# Altium PCB Modulo_MotorDC.PcbDoc
Units mil, origin at the board's own origin, x right, y up, seen from the top; angles counter-clockwise.
Board outline 5000 x 4000 mil, 2 copper layers (Top Layer, Bottom Layer); 45 components, 43 nets, 174 pads, 7 vias.
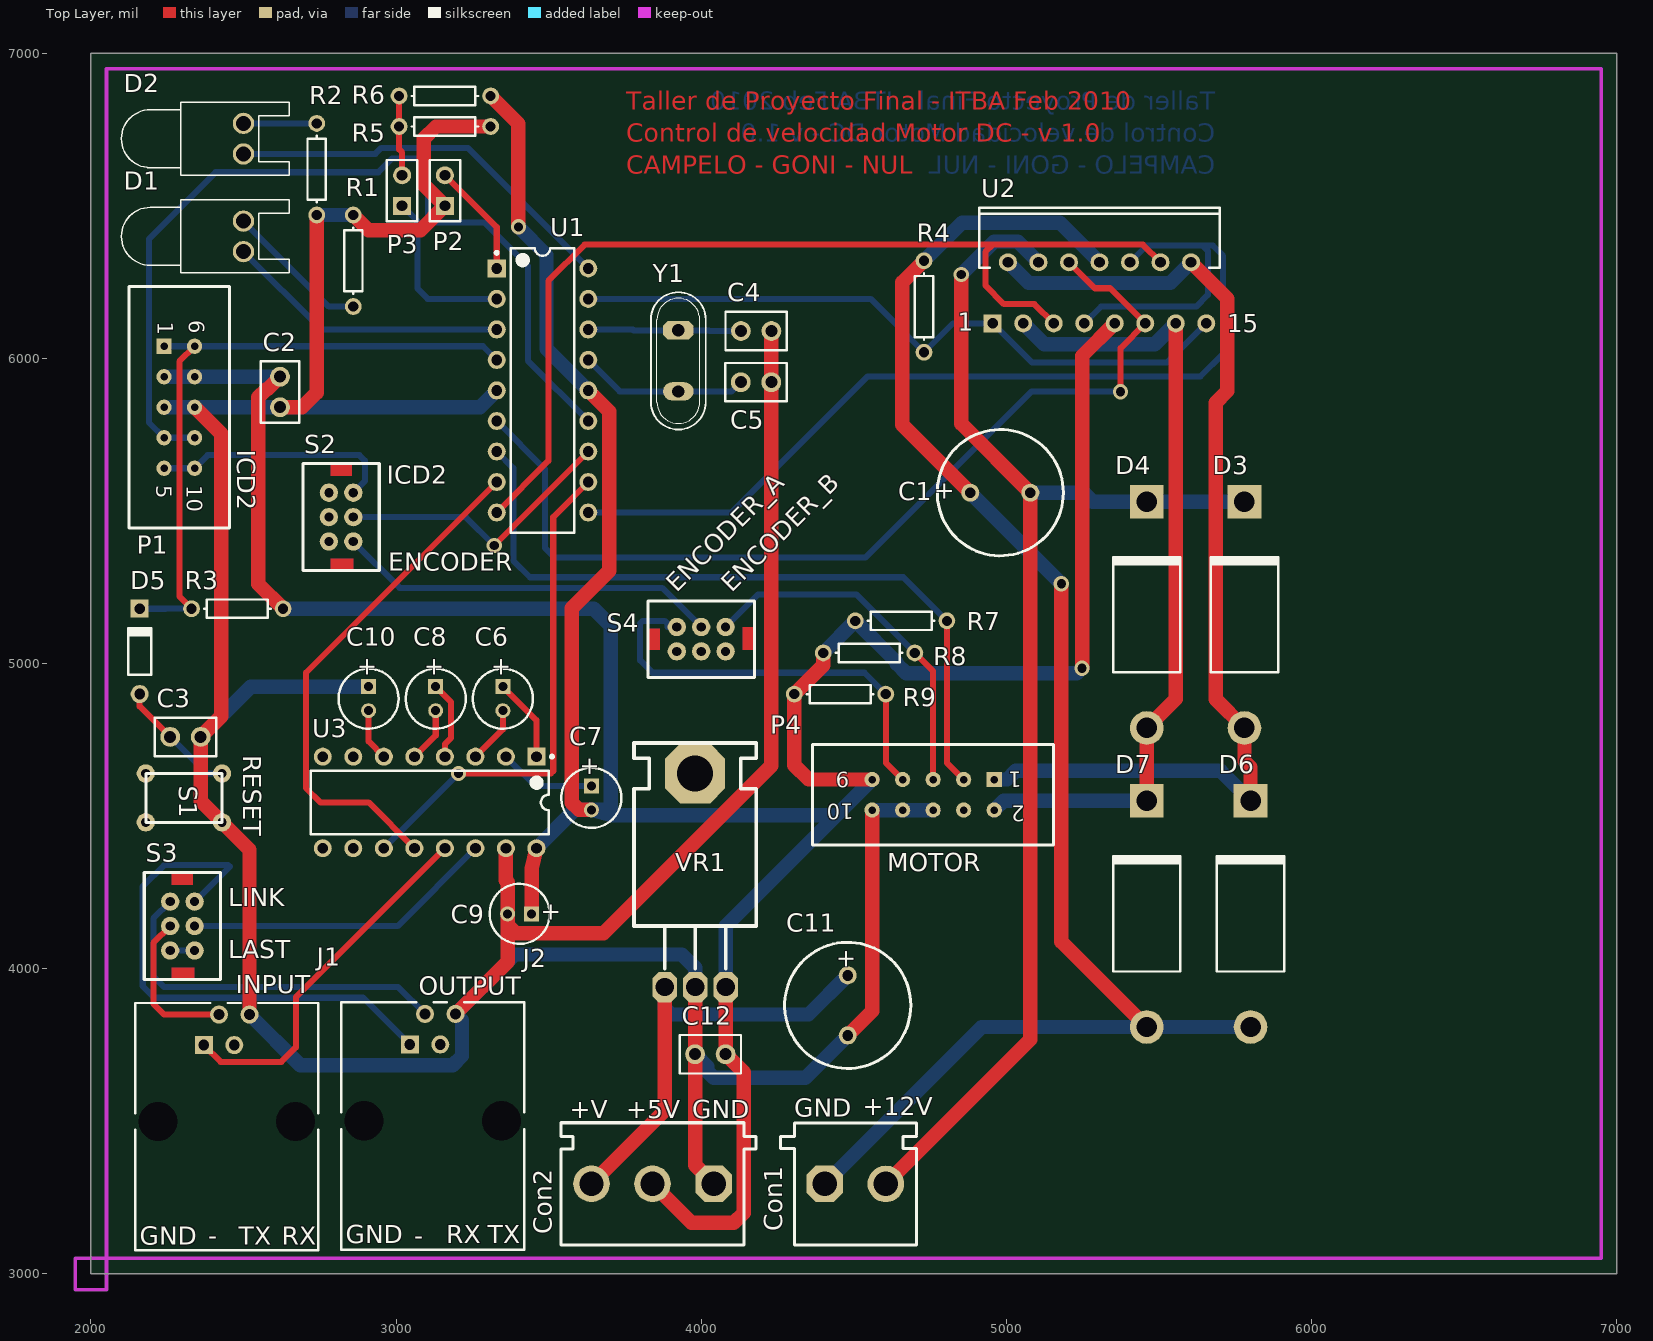
[diagram p0: Top Layer view]
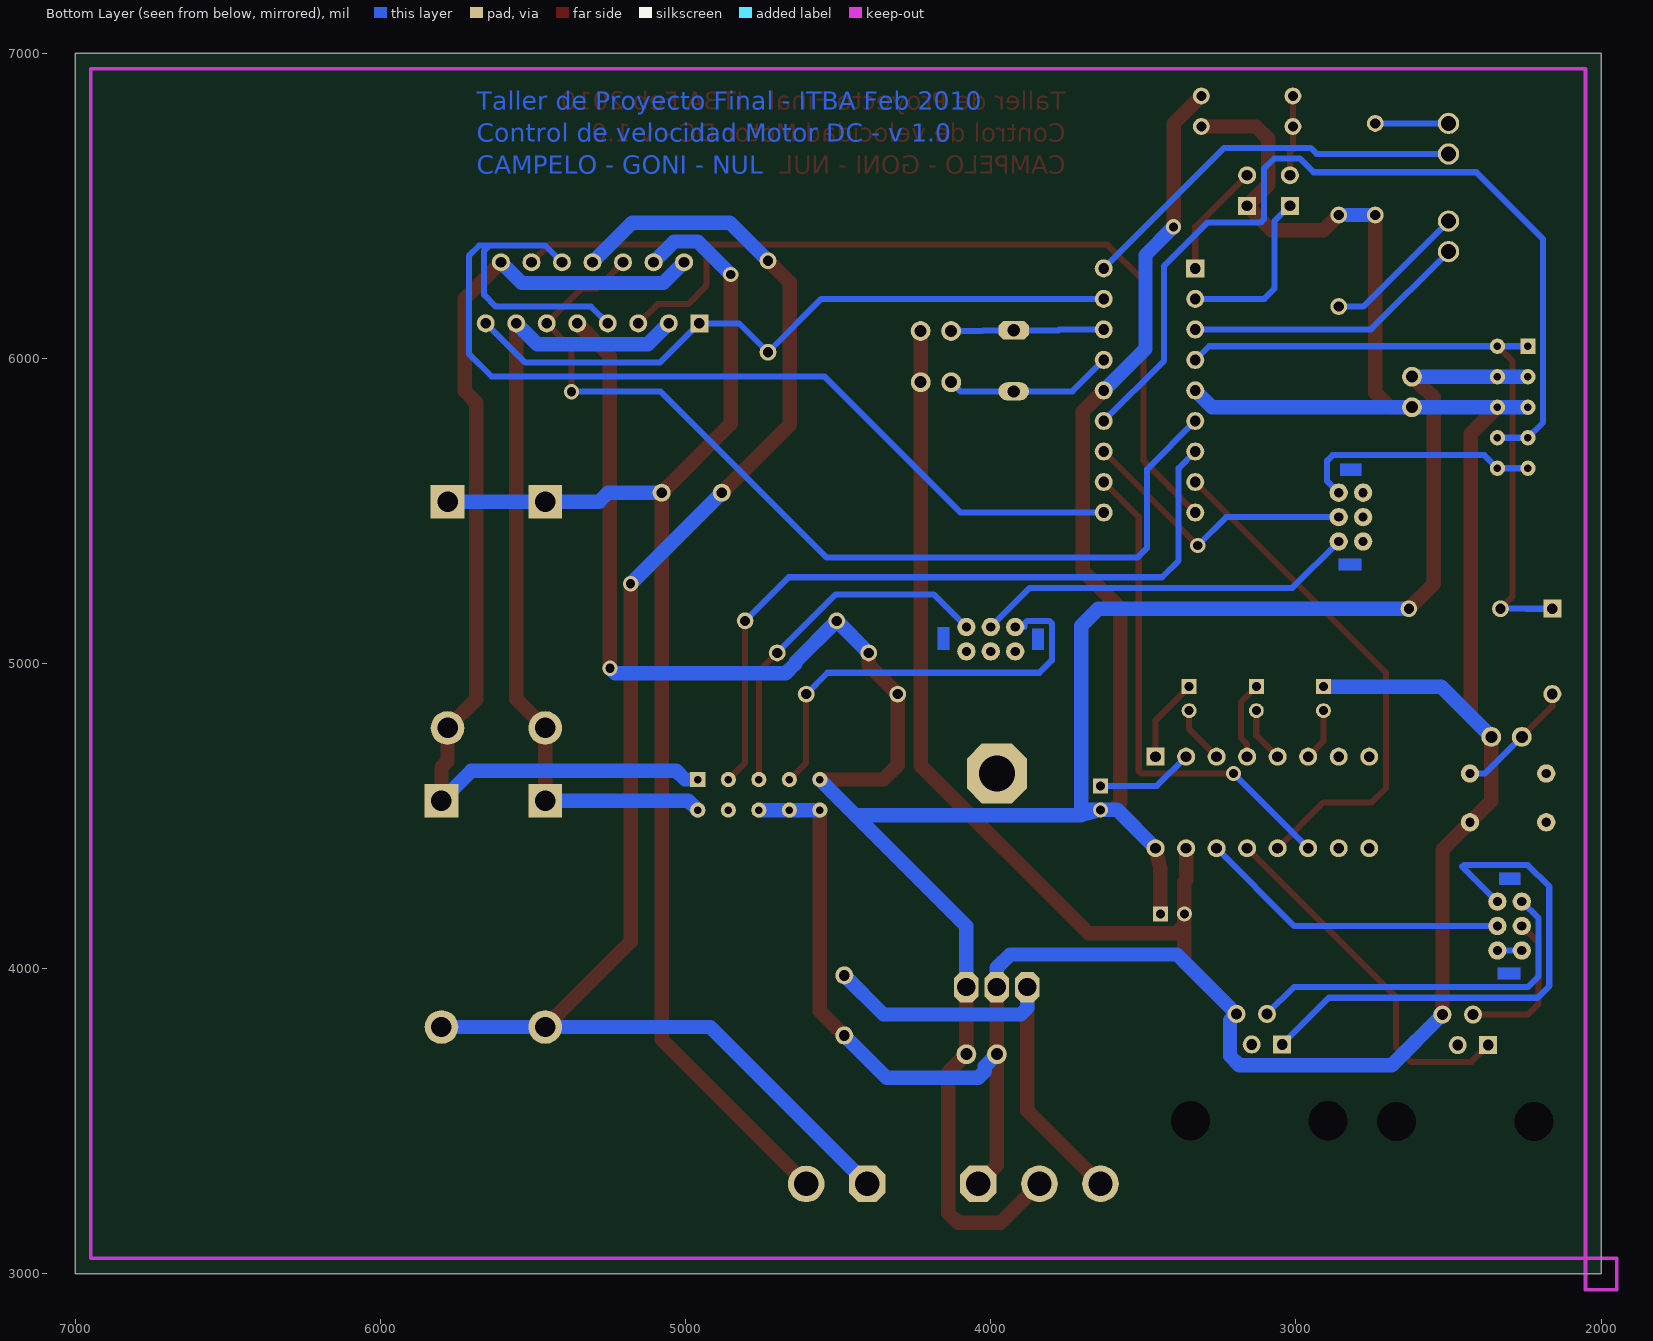
[diagram p1: Bottom Layer view, seen from below]

## Layer stack, top to bottom
Top Layer: signal copper 1.4
Dielectric: dielectric 12.6, FR-4, Dk 4.8
Bottom Layer: signal copper 1.4

## Board outline
2000,3000 7000,3000 7000,7000 2000,7000

## Design rules (kind name [scope] priority, off if disabled: settings)
Clearance [All] p1: gap=15
DiffPairsRouting [All] p1: maxlimit=10 minlimit=10 mostfreqgap=10 maxuncoupledlength=750
PolygonConnect [All] p1: connectstyle=Relief reliefconductorwidth=10 reliefentries=4 polygonreliefangle="90 Angle"
RoutingVias [All] p1: holewidth=30 width=50 viastyle="Through Hole" minholewidth=30 minwidth=50 maxholewidth=50 maxwidth=70
SilkscreenOverComponentPads [All] p1: minsilkscreentomaskgap=10
SolderMaskExpansion [All] p1: expansion=4
Width Signal [NOT (InNet('+12V MOTOR') OR InNet('MOTOR GND') OR InNet('MOTOR_A') OR InNet('MOTOR_B') OR InNet('+5V VCC') OR InNet('+V LOGIC') OR InNet('GND'))] p1: maxlimit=25 minlimit=15 preferedwidth=20 minimp=50.000000 maximp=50.000000 favimp=50.000000
Width Power [(InNet('+12V MOTOR') OR InNet('MOTOR GND') OR InNet('MOTOR_A') OR InNet('MOTOR_B') OR InNet('+5V VCC') OR InNet('+V LOGIC') OR InNet('GND'))] p2: maxlimit=47 minlimit=47 preferedwidth=47 minimp=50.000000 maximp=50.000000 favimp=50.000000
26 further rules are at their usual default settings.

## Components (designator, comment, footprint, x,y, rotation, side; value= is the part's Value field where it differs from the comment)
C1 "Cap Pol1" RB5-10.5 4980,5560 r180 top
C2 "Cap" CAPR2.54-5.1x3.2 2620,5890 r90 top
C3 "Cap" CAPR2.54-5.1x3.2 2310,4760 r180 top
C4 "Cap" CAPR2.54-5.1x3.2 4180,6090 r180 top
C5 "Cap" CAPR2.54-5.1x3.2 4179.61,5922.01 r180 top
C6 "Cap Pol1" CAPPR2-5x6.8 3350,4885 r270 top
C7 "Cap Pol1" CAPPR2-5x6.8 3640,4560 r270 top
C8 "Cap Pol1" CAPPR2-5x6.8 3130,4885 r270 top
C9 "Cap Pol1" CAPPR2-5x6.8 3405,4180 r180 top
C10 "Cap Pol1" CAPPR2-5x6.8 2910,4885 r270 top
C11 "Cap Pol1" RB5-10.5 4480,3880 r270 top
C12 "Cap" CAPR2.54-5.1x3.2 4030,3720 r0 top
Con1 "POWER_B" My_CN2 4305.5,3495.5 r0 top
Con2 "POWER_A" My_CN3 4140,3095 r180 top
D1 "LED0" LED-0 2500,6400 r270 top
D2 "LED0" LED-0 2500,6720 r270 top
D3 "Diode FR304" DIO18.84-9.6x5.6 5780,5160 r90 top
D4 "Diode FR304" DIO18.84-9.6x5.6 5460,5160 r90 top
D5 "Diode 1N4148" DIO7.1-3.9x1.9 2160,5040 r90 top
D6 "Diode FR304" DIO18.84-9.6x5.6 5800,4180 r90 top
D7 "Diode FR304" DIO18.84-9.6x5.6 5460,4180 r90 top
J1 "SERIAL A" 15-43-6245 2445,3077.95 r0 top
J2 "SERIAL B" 15-43-6245 3120,3080 r0 top
P1 "ICD2" HEADER10_5x2_B 2290,5840 r270 top
P2 "JUMPER VREF-" HDR1X2 3160,6500 r90 top
P3 "JUMPER VREF+" HDR1X2 3020,6500 r90 top
P4 "MOTOR DC" HEADER10_5x2_A 4760,4570 r180 top
R1 "Res1" AXIAL-0.3 2860,6320 r90 top
R2 "Res1" AXIAL-0.3 2740,6620 r270 top
R3 "Res1" AXIAL-0.3 2480,5180 r0 top
R4 "Res1" AXIAL-0.3 4730,6170 r90 top
R5 "Res1" AXIAL-0.3 3160,6760 r180 top
R6 "Res1" AXIAL-0.3 3160,6860 r0 top
R7 "Res1" AXIAL-0.3 4655,5140 r0 top
R8 "Res1" AXIAL-0.3 4550,5035 r0 top
R9 "Res1" AXIAL-0.3 4455,4900 r0 top
S1 "SW-PB" TS-063 2305,4560 r270 top
S2 "PROGRAM SELECTION" LD-202mini 2820,5480 r270 top
S3 "SERIAL CHAIN" LD-202mini 2300,4140 r270 top
S4 "ENCODER SELECTION" LD-202mini 4000,5080 r0 top
U1 "PIC16F88" PDIP300-P18 3480,5895 r0 top
U2 "L298N" Multiwatt15V 5305,6215 r0 top
U3 "MAX232" PE16A 3110,4545 r270 top
VR1 "7805" My_TO-220 3880.51,3940.51 r0 top
Y1 "20MHz" My_Crystal 3925,5992.01 r270 top

## Footprints (in the part's own frame and the unit in brackets; to place one, negate y for a bottom-side part, rotate by r counter-clockwise, add the part's x,y. Pads: shape width x height; smd on the part's side, far side on the other; paste and mask are expansions set on the pad)
15-43-6245 [mm] "Connector; PCB Jack, Thru-Hole; 1-Port; Unshielded without Lightpipes; Right Angle"
  rect 1.5x1.5 hole 0.9: 1(-1.905,17.07)
  round 1.5 hole 0.9: 2(-0.635,19.61) 3(0.635,17.07) 4(1.905,19.61)
  round 2.95 hole 3.25 unplated: MH1(-5.715,10.72) MH2(5.715,10.72)
  silkscreen extent -7.62,0 7.62,20.57
AXIAL-0.3 [mm] "Axial Device, Thru-Hole; 2 Leads; 0.3 in Pin Spacing"
  round 1.4 hole 0.85: 1(-3.81,0) 2(3.81,0)
  silkscreen extent -2.77,-0.76 2.77,0.76
CAPPR2-5x6.8 [mm] "Capacitor, Electrolytic, Radial; Body 5 x 6.8 mm (Dia.xH typ); Pin Spacing 2 mm (typ)"
  rect 1.25x1.25 hole 0.75: 1(-1,0)
  round 1.25 hole 0.75: 2(1,0)
  silkscreen extent -2.5,-2.5 2.5,2.5
CAPR2.54-5.1x3.2 [mm] "Capacitor, Ceramic, Thru-Hole, Dipped Radial; Body 5.1 x 3.2 mm (WxT) Pin Spacing 2.54 mm (typ)"
  round 1.65 hole 1: 1(-1.27,0) 2(1.27,0)
  silkscreen extent -2.55,-1.6 2.55,1.6
DIO7.1-3.9x1.9 [mm] "Diode, Axial; Body 3.8 x 1.9 mm (LxDia. max), Lead Dia. 0.53 mm (max)"
  round 1.5 hole 0.9: 1(-3.55,0)
  rect 1.5x1.5 hole 0.9: 2(3.55,0)
  silkscreen extent -1.95,-0.95 2.05,0.95
DIO18.84-9.6x5.6 [mm] "Diode, Axial; Body 9.5 x 5.6 mm (LxDia. max), Lead Dia. 1.32 mm (max)"
  round 2.8 hole 1.7: 1(-9.42,0)
  rect 2.8x2.8 hole 1.7: 2(9.42,0)
  silkscreen extent -4.8,-2.8 4.9,2.8
HDR1X2 [mm] "Connector; Header; 2 Position"
  rect 1.5x1.5 hole 0.9: 1(0,0)
  round 1.5 hole 0.9: 2(2.54,0)
  silkscreen extent -1.27,-1.27 3.81,1.27
HEADER10_5x2_A [mil] "Header con polaridad para 10 pines (5x2)"
  rect 50x50 hole 25: 1(-200,-50)
  round 50 hole 25: 2(-200,50) 3(-100,-50) 4(-100,50) 5(0,-50) 6(0,50) 7(100,-50) 8(100,50) 9(200,-50) 10(200,50)
  silkscreen extent -395,-165 395,165
HEADER10_5x2_B [mil] "Header con polaridad para 10 pines (5x2)"
  rect 50x50 hole 25: 1(-200,-50)
  round 50 hole 25: 2(-100,-50) 3(0,-50) 4(100,-50) 5(200,-50) 6(-200,50) 7(-100,50) 8(0,50) 9(100,50) 10(200,50)
  silkscreen extent -395,-165 395,165
LD-202mini [mil] "Doble inversor mini 90 grados"
  round 60 hole 30: 1(0,40) 2(-80,40) 3(80,40) 4(0,-40) 5(-80,-40) 6(80,-40)
  Multi-Layer region: -175,-35 -135,-35 -135,35 -175,35
  Multi-Layer region: 135,-35 175,-35 175,40 135,40
  silkscreen extent -175,-125 175,125
LED-0 [mil] "Typical INFRARED GaAs LED; 2 Leads"
  round 70 hole 50: 1(50,0) 2(-50,0)
  silkscreen extent -120,-400 120,150
Multiwatt15V [mm] "TO, Thru-Hole, Vertical, Heatsink Mounted; 15 Bent Staggered Leads; Pitch 1.27 mm"
  rect 1.5x1.5 hole 0.9: 1(-8.89,-2.54)
  round 1.5 hole 0.9: 2(-7.62,2.54) 3(-6.35,-2.54) 4(-5.08,2.54) 5(-3.81,-2.54) 6(-2.54,2.54) 7(-1.27,-2.54) 8(0,2.54) 9(1.27,-2.54) 10(2.54,2.54) 11(3.81,-2.54) 12(5.08,2.54) 13(6.35,-2.54) 14(7.62,2.54) 15(8.89,-2.54)
  silkscreen extent -10,2.09 10,7.09
My_CN2 [mil]
  oct 120x120 hole 80: 1(99.5,-200.5)
  round 120 hole 80: 2(299.5,-200.5)
  silkscreen extent -45,-400 400,0
My_CN3 [mil]
  oct 120x120 hole 80: 1(99.5,-200.5)
  round 120 hole 80: 2(299.5,-200.5) 3(499.5,-200.5)
  silkscreen extent -40,-400 600,0
My_Crystal [mil]
  oct 60x100 hole 40: 1(-100,0)
  oval 60x100 hole 40: 2(100,0)
  silkscreen extent -225,-90 225,90
My_TO-220 [mil]
  oct 196.85x196.85 hole 118.11: 0(99.49,699.49)
  oct 80x100 hole 60: 1(-0.5,-0.5) 2(99.5,-0.5) 3(199.5,-0.5)
  silkscreen extent -100,60 299,799
PDIP300-P18 [mm] "DIP, 18-Leads, Row Spacing 7.62mm, Pitch 2.54mm, Body 22.9x6.6mm"
  rect 1.5x1.5 hole 0.9: 1(-3.81,10.16)
  round 1.5 hole 0.9: 2(-3.81,7.62) 3(-3.81,5.08) 4(-3.81,2.54) 5(-3.81,0) 6(-3.81,-2.54) 7(-3.81,-5.08) 8(-3.81,-7.62) 9(-3.81,-10.16) 10(3.81,-10.16) 11(3.81,-7.62) 12(3.81,-5.08) 13(3.81,-2.54) 14(3.81,0) 15(3.81,2.54) 16(3.81,5.08) 17(3.81,7.62) 18(3.81,10.16)
  silkscreen extent -3.93,-11.85 2.65,11.85, body extent -3.6,-11.8 3.6,11.8, height 5.34
PE16A [mm] "DIP, 16-Leads, Row Spacing 7.62mm, Pitch 2.54mm, Body 19.18x6.99mm"
  rect 1.5x1.5 hole 0.9: 1(-3.81,8.89)
  round 1.5 hole 0.9: 2(-3.81,6.35) 3(-3.81,3.81) 4(-3.81,1.27) 5(-3.81,-1.27) 6(-3.81,-3.81) 7(-3.81,-6.35) 8(-3.81,-8.89) 9(3.81,-8.89) 10(3.81,-6.35) 11(3.81,-3.81) 12(3.81,-1.27) 13(3.81,1.27) 14(3.81,3.81) 15(3.81,6.35) 16(3.81,8.89)
  silkscreen extent -3.93,-9.9 2.65,10.32, body extent -3.3,-9.9 3.3,9.9, height 5.08
RB5-10.5 [mm] "Motor, General Kind; 2 Leads"
  round 1.5 hole 0.9: 1(-2.5,0) 2(2.5,0)
  silkscreen extent -5.25,-5.25 5.25,5.25
TS-063 [mil] "Boton normal abierto"
  round 60 hole 30: 1(80,125) 1(80,-125) 2(-80,125) 2(-80,-125)
  silkscreen extent -80,-125 80,125

## Part data
C1 C6 C7 C8 C9 C10 C11: "Polarized Capacitor (Radial)"
C2 C3 C4 C5 C12: "Capacitor"
Con1: library part "CON2 pin blue", "Connector blue screw"
Con2: library part "CON3 pin Green", "Connector green screw"
D1 D2: "Typical INFRARED GaAs LED"
D3 D4 D6 D7: library part "Diode 1N5404", "3 Amp General Purpose Rectifier"
D5: "High Conductance Fast Diode"
J1 J2: library part 15-43-6245, "Right Angle, Standard Profile, RJ45-Keyed, Flange Mount PCB Jack"
P1: library part "Header 5X2A", "Header, 5-Pin, Dual row"
P2 P3: library part "Header 2", "Header, 2-Pin"
P4: library part "Header 5X2", "Header, 5-Pin, Dual row"
R1 R2 R3 R4 R5 R6 R7 R8 R9: "Resistor"
S1: "Switch"
S2 S3 S4: library part SW-DPDT, "Double-Pole, Double-Throw Switch"
U1: library part PIC16F88-E/P, "Enhanced FLASH Microcontroller with nanoWatt Technology, 10-Bit A/D, 4K (x14-Bit words) FLASH, 368 Bytes RAM, 18-Pin PDIP, Standard VDD Range, Extended Temperature"
U2: "Dual Full Bridge Driver"
U3: library part MAX232ACPE, "+5V Powered, Multi-Channel RS-232 Driver/Receiver"
VR1: library part "Volt Reg", "Voltage Regulator"
Y1: library part XTAL, "Crystal Oscillator"

## Via types
v1: diameter 50, hole 30, Top Layer to Bottom Layer, 7 vias

## Nets (pads, with @x,y where several pads share a name; then routed paths per layer and width w, separated by ;. In a path a pad name is that pad's centre, name@x,y a point inside that pad or via, vN(x,y) a via of type N, cw(c..) or ccw(c..) an arc to the next point about the centre after c; other vN are vias at no path point)
"+5V VCC": C2.2 C7.2 C9.1 C12.2 Con2.2 P1.2 P1.7 P4.9 R3.2 R6.2 R7.1 R8.1 R9.1 U1.14 U2.9 U3.16 VR1.3 | length 11827.9
  Top Layer w47: C2.2 2580,5900 2576,5900 2549,5873 2549,5261 R3.2 ; R6.2 3401,6769 v1(3401,6431) ; C9.1 3444.37,4325.74 U3.16 ; U1.14 3699,5826 3699,5304 3576,5181 3576,4544 3599.37,4520.63 C7.2 ; Con2.2 3968,3168 4107,3168 4139,3200 4139,3661 C12.2 4080,3830 VR1.3 ; R8.1 4400,4995 R9.1 4305,4667 4352,4620 P4.9 ; v1(5248,4985) 5248,6008 U2.9
  Bottom Layer w47: P1.2 P1.7 C2.2 ; R3.2 3648,5180 3704,5124 3704,4520.63 C7.2 ; v1(3401,6431) 3493,6339 3493,6032 U1.14 ; U3.16 3585.63,4520.63 C7.2 ; VR1.3 4080.01,4140.01 4443,4503 ; R8.1 R7.1 4640,5005 4640,5000 4672,4968 5231,4968 v1(5248,4985) ; C7.2 3704,4503 4443,4503 ; 4443,4503 P4.9 4443,4503
"+12V MOTOR": C1.1 Con1.2 D3.2 D4.2 U2.4 | length 4309.5
  Top Layer w47: Con1.2 5078.43,3768.43 C1.1 4852,5786.43 v1(4852,6275.03)
  Bottom Layer w47: v1(4852,6275.03) 4960,6383.03 5036.97,6383.03 U2.4 ; C1.1 5254,5560 5283.13,5530.87 D4.2 D3.2
"+V LOGIC": C11.1 Con2.3 VR1.1 | length 1474
  Top Layer w47: Con2.3 3880.01,3535.01 VR1.1
  Bottom Layer w47: VR1.1 3880.01,3872 3902.01,3850 4351.57,3850 C11.1
ENCODER: S2.3 S4.1 | length 1256
  Bottom Layer w20: S2.3 3012,5248 3872,5248 S4.1
ENCODER_A: P4.7 R9.2 S4.2 | length 1412.2
  Top Layer w20: R9.2 4605,4675 P4.7
  Bottom Layer w20: S4.2 3890,5120 3890,5130 3880,5140 3808,5140 3800,5132 3800,5011 3841,4970 4535,4970 R9.2
ENCODER_B: P4.5 R8.2 S4.3 | length 1183.7
  Top Layer w20: R8.2 4760,4975 P4.5
  Bottom Layer w20: S4.3 4187,5227 4508,5227 R8.2
GND: C2.1 C3.1 C4.1 C5.1 C9.2 C10.1 C11.2 C12.1 Con2.1 J1.4 J2.4 P1.3 P1.8 P2.1 P4.6 P4.8 P4.10 R1.2 R2.2 R5.1 S1.1@2430,4480 U1.5 U3.15 VR1.2 | length 12822.1
  Top Layer w47: P1.8 2427,5753 2427,4827 C3.1 2360,4550 2430,4480 2520,4390 J1.4 ; C2.1 2692,5840 2740,5888 R2.2 ; R1.2 2910,6420 3080,6420 P2.1 3091,6569 3091,6720 3131,6760 R5.1 ; J2.4 3365.63,4022.68 3365.63,4142.37 ; U3.15 3360,4289.63 3365.63,4284 C9.2 ; VR1.2 3980.01,3830.01 C12.1 3980,3356 Con2.1 ; C4.1 4230,5961.8 C5.1 4229.61,4665.61 3680,4116 3392,4116 3365.63,4142.37 ; C11.2 4560,3861.57 P4.10 ; 3365.63,4142.37 C9.2 ; 3365.63,4142.37 C9.2
  Bottom Layer w47: P1.3 P1.8 C2.1 3275,5840 U1.5 ; C3.1 2524.37,4924.37 C10.1 ; J1.4 2686,3684 3186,3684 3216,3714 3216,3831.05 J2.4 3389.95,4047 3936,4047 3980.01,4002.99 VR1.2 ; R2.2 R1.2 ; C12.1 4020,3680 4020,3664 4041,3643 4341.43,3643 C11.2 ; P4.10 P4.8 P4.6
ICD2_CLK: P1.5 P1.10 S2.2 | length 804
  Bottom Layer w20: P1.5 P1.10 2383,5683 2880,5683 2898,5665 2898,5598 S2.2
ICD2_CLK/ENCODER: S2.1 U1.12 | length 936.1
  Top Layer w20: v1(3322,5387) U1.12
  Bottom Layer w20: S2.1 3229,5480 v1(3322,5387)
ICD2_DATA: P1.4 P1.9 U1.13 | length 2955.5
  Bottom Layer w20: P1.9 P1.4 2190,5790 2190,6391 2409,6610 2942,6610 2986.53,6654.53 3072,6654.53 3105,6621.53 3105,6456 3116,6445 3290,6445 3432,6303 3432,5993 U1.13
INPUT_A: U1.10 U2.7 U2.10 | length 3753.2
  Bottom Layer w20: U1.10 4099,5495 4545,5941 5636,5941 5710,6015 5710,6336 5676,6370 5642,6370 ; U2.7 5310,6170 5622,6170 5660,6208 5660,6352 5642,6370 ; U2.10 5460,6370 ; 5460,6370 5642,6370 ; 5460,6370 5642,6370
INPUT_B: U1.9 U2.5 U2.12 | length 3819.6
  Top Layer w20: U1.9 3499,5664 3499,6254 3618,6373 4955,6373 ; U2.5 5092,6178 4992,6178 4931,6239 4931,6349 4955,6373 ; U2.12 5447,6373 ; 4955,6373 5447,6373 ; 4955,6373 5447,6373
LED1: D1.1 U1.3 | length 935.6
  Bottom Layer w20: D1.1 2755,6095 U1.3
LED2: D2.1 U1.18 | length 1301.5
  Bottom Layer w20: D2.1 2932.47,6670 2952,6689.53 3235.47,6689.53 U1.18
MAX_TX: S3.1 U3.14 | length 1025.6
  Bottom Layer w20: S3.1 3005,4140 U3.14
MCLR: D5.2 P1.1 P1.6 R3.1 U1.4 | length 2176
  Top Layer w20: R3.1 2290,5220 2290,5990 P1.6
  Bottom Layer w20: D5.2 2244,5179.76 2244.24,5180 R3.1 ; P1.1 P1.6 3285,6040 U1.4
"MOTOR GND": C1.2 Con1.1 D6.1 D7.1 R4.2 U2.8 | length 5160.7
  Top Layer w47: R4.2 4659,6249 4659,5782.57 C1.2 ; v1(5180,5261.57) 5180,4089.13 D7.1
  Bottom Layer w47: Con1.1 4919.13,3809.13 D7.1 D6.1 ; R4.2 4855.03,6445.03 5174.97,6445.03 U2.8 ; C1.2 v1(5180,5261.57)
MOTOR_A: D4.1 D7.2 P4.2 U2.3 U2.13 | length 2673.4
  Top Layer w47: D7.2 D4.1 5555,4884.13 U2.13
  Bottom Layer w47: P4.2 4990.87,4550.87 D7.2 ; U2.3 5124,6046 5486,6046 U2.13
MOTOR_B: D3.1 D6.2 P4.1 U2.2 U2.14 | length 3425.4
  Top Layer w47: U2.14 5724,6196 5724,5893 5686,5855 5686,4883.13 D3.1 5780,4680 5800,4660 D6.2
  Bottom Layer w47: P4.1 5002,4620 5031,4649 5701.87,4649 D6.2 ; U2.2 5073.03,6246.97 5536.97,6246.97 U2.14
MOTOR_IDX: P4.3 R7.2 U1.7 | length 2425.2
  Top Layer w20: R7.2 4805,4675 P4.3
  Bottom Layer w20: U1.7 3384.53,5640.47 3384.53,5337.47 3439,5283 4662,5283 R7.2
NetC3_2: C3.2 D5.1 S1.2@2430,4640 | length 401.4
  Top Layer w20: D5.1 2160,4860 C3.2
  Bottom Layer w20: C3.2 2380,4640 S1.2@2430,4640
NetC4_2: C4.2 U1.16 Y1.1 | length 502.1
  Bottom Layer w20: U1.16 3776,6095 3778.99,6092.01 Y1.1 4026,6092.01 4028.01,6090 C4.2
NetC5_2: C5.2 U1.15 Y1.2 | length 554.7
  Bottom Layer w20: U1.15 3732.99,5892.01 Y1.2 4099.61,5892.01 C5.2
NetC6_1: C6.1 U3.1 | length 274.9
  Top Layer w20: C6.1 3460,4814.37 U3.1
NetC6_2: C6.2 U3.3 | length 187.9
  Top Layer w20: U3.3 3350,4785 C6.2
NetC7_1: C7.1 U3.2 | length 319.6
  Bottom Layer w20: U3.2 3455.63,4599.37 C7.1
NetC8_1: C8.1 U3.4 | length 258.4
  Top Layer w20: C8.1 3180,4874.37 3180,4756 3160,4736 U3.4
NetC8_2: C8.2 U3.5 | length 179.6
  Top Layer w20: U3.5 3130,4765 C8.2
NetC10_2: C10.2 U3.6 | length 171.3
  Top Layer w20: C10.2 2910,4745 U3.6
NetD1_2: D1.2 R1.1 | length 476
  Bottom Layer w20: D1.2 2780,6170 R1.1
NetD2_2: D2.2 R2.1 | length 240
  Bottom Layer w20: D2.2 R2.1
NetP3_2: P3.2 R5.2 R6.1 | length 264.1
  Top Layer w20: R6.1 R5.2 3010,6685 3020,6675 P3.2
NetS3_3: S3.3 S3.6 | length 80
  Bottom Layer w20: S3.6 S3.3
PIC_RX: U1.8 U3.12 | length 1698.5
  Top Layer w20: U3.12 2910,4545 2752,4545 2705,4592 2705,4970 U1.8
PIC_TX: U1.11 U3.11 | length 1654.4
  Top Layer w20: v1(3205,4640) 3507,4640 3515,4648 3515,5480 U1.11
  Bottom Layer w20: U3.11 v1(3205,4640)
PWM_ENABLE: U1.6 U2.6 U2.11 | length 3196.4
  Top Layer w20: U2.6 5290,6230 5340,6230 U2.11 5374,6034 v1(5374,5891)
  Bottom Layer w20: U1.6 3488,5637 3488,5379 3520,5347 4538,5347 5082,5891 v1(5374,5891)
SENSE: R4.1 U1.17 U2.1 U2.15 | length 2243.7
  Bottom Layer w20: U1.17 4555,6195 R4.1 4825,6115 U2.1 5084,5986 5526,5986 U2.15
SERIAL_A_RX: J1.1 U3.13 | length 1198.8
  Top Layer w20: J1.1 2425,3695 2624,3695 2672,3743 2672,3907 U3.13
SERIAL_A_TX: J1.2 S3.4 | length 507.3
  Top Layer w20: S3.4 2205,4085 2205,3885 2240,3850 J1.2
SERIAL_B_RX: J2.2 S3.5 | length 1208.7
  Bottom Layer w20: S3.5 2205,4165 2205,3975 2240,3940 3007.05,3940 J2.2
SERIAL_B_TX: J2.1 S3.2 | length 1759.8
  Bottom Layer w20: S3.2 2455,4335 2450,4340 2240,4340 2170,4270 2170,3943 2208,3905 2892.05,3905 J2.1
VREF+: P3.1 U1.2 | length 565.8
  Bottom Layer w20: P3.1 3070.47,6449.53 3070.47,6228.53 3104,6195 U1.2
VREF-: P2.2 U1.1 | length 375.4
  Top Layer w20: P2.2 3330,6430 U1.1
pads on no net: J1.3 J1.MH1 J1.MH2 J2.3 J2.MH1 J2.MH2 P4.4 S1.1@2180,4480 S1.2@2180,4640 S2.4 S2.5 S2.6 S4.4 S4.5 S4.6 U3.7 U3.8 U3.9 U3.10 VR1.0

## Keep-outs
Keep-Out Layer:
  lines w11.81: 2051.18,3051.18 1948.82,3051.18 1948.82,2948.82 2051.18,2948.82 2051.18,3051.18 ; 2051.18,3051.18 2051.18,6948.82 6948.82,6948.82 6948.82,3051.18 2051.18,3051.18

## Other copper
Top Layer:
  text "Taller de Proyecto Final - ITBA Feb 2010" at 3755,6815 h60
  text "Control de velocidad Motor DC - v 1.0" at 3755,6710 h60
  text "CAMPELO - GONI - NUL" at 3755,6605 h60
Bottom Layer:
  text "Taller de Proyecto Final - ITBA Feb 2010" at 5685,6815 h60
  text "Control de velocidad Motor DC - v 1.0" at 5685,6710 h60
  text "CAMPELO - GONI - NUL" at 5685,6605 h60

## Silkscreen, mask and mechanical layers (free items; w line width, h text height)
Top Overlay:
  text "ICD2" at 2970,5590 h60
  text "ENCODER" at 2975,5305 h60
  text "ENCODER_A" at 3920,5230 h60 r45
  text "ENCODER_B" at 4100,5230 h60 r45
  text "RESET" at 2500,4700 h60 r270
  text "MOTOR" at 4610,4320 h60
  text "LINK" at 2450,4205 h60
  text "LAST" at 2450,4035 h60
  text "INPUT" at 2475,3920 h60
  text "OUTPUT" at 3075,3915 h60
  text "+12V" at 4530,3520 h60
  text "GND" at 4305,3515 h60
  text "+V" at 3570,3510 h60
  text "+5V" at 3755,3510 h60
  text "GND" at 3970,3510 h60
  text "GND" at 2835,3100 h60
  text "RX" at 3165,3100 h60
  text "TX" at 3300,3100 h60
  text "GND" at 2160,3095 h60
  text "-" at 2385,3095 h60
  text "TX" at 2485,3095 h60
  text "RX" at 2625,3095 h60
  text "-" at 3060,3095 h60

## Dimensions
2000,3000 to 2051.18,3051.18 on Mechanical 1
2000,3000 to 2051.18,3051.18 on Mechanical 1

## Text inside footprints (layer, text, board x,y; h text height)
C1: Top Overlay "+" at 4830,5590 h59.06 r180
C6: Top Overlay "+" at 3320.47,5021.81 h59.06 r270
C7: Top Overlay "+" at 3610.47,4696.81 h59.06 r270
C8: Top Overlay "+" at 3100.47,5021.81 h59.06 r270
C9: Top Overlay "+" at 3541.81,4209.53 h59.06 r180
C10: Top Overlay "+" at 2880.47,5021.81 h59.06 r270
C11: Top Overlay "+" at 4450,4065 h59.06 r270
P1: Top Overlay "1" at 2220,6120 h50 r270; Top Overlay "5" at 2215,5585 h50 r270; Top Overlay "10" at 2315,5585 h50 r270; Top Overlay "6" at 2320,6125 h50 r270
P4: Top Overlay "2" at 5060,4535 h50 r180; Top Overlay "1" at 5050,4645 h50 r180; Top Overlay "9" at 4485,4645 h50 r180; Top Overlay "10" at 4500,4540 h50 r180
U2: Top Overlay "1" at 4840,6090 h59.06; Top Overlay "15" at 5724,6085 h59.06